# EAGLE board MEMS-preamp_v13a (EAGLE 8.5.0)
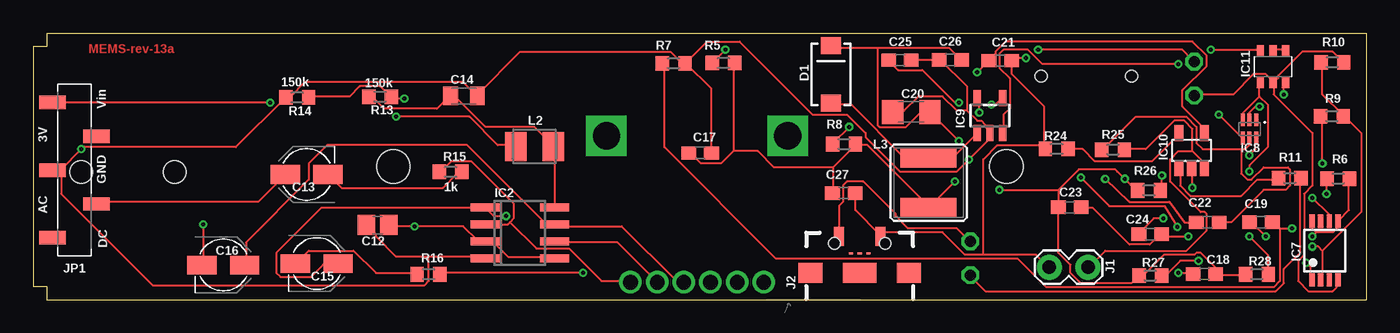
[diagram p0: board, top side]
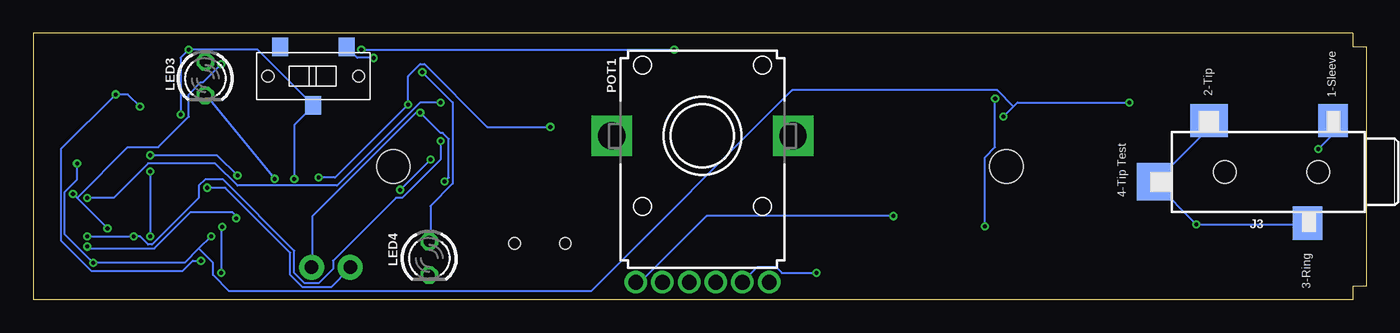
[diagram p1: board, bottom side, seen from below]

Size 100 x 20 mm. Coordinates in mm from the lower left corner, seen from the top.
Outline: 0,19 0,1 1.02,1 1,0 100,0 100,20 1,20 1,19 0,19
Copper layers (1*16): Top 0.035mm / dielectric 1.5mm / Bottom 0.035mm
Design rules "SeeedStudio_2layer_DRU_no_angle_20140221": minimum track width 6mil, minimum drill 12mil, track to track 6mil, track to pad 6mil, pad to pad 6mil, via to via 6mil, smd to smd 0mil, copper to edge 10mil, drill to drill 10mil, minimum pad ring 10mil, minimum via ring 6mil, stop-mask expansion 2mil, vias tented up to drill 100mil, thermal gap 10mil
Holes 2.5 mm at 73,10 27,10

## Footprints (pad centres in the part's own frame; a part is rotated, then mirrored left to right if it is on the bottom)
C0805 = smd 1.3 x 1.5: 1 -0.85,0; 2 0.85,0
PANASONIC_B = smd 2.2 x 1.4: + 1.6,0; - -1.6,0
C0805K = smd 1.1 x 1.4: 1 -1,0; 2 1,0
C0603 = smd 1.1 x 1: 1 -0.85,0; 2 0.85,0
C1206 = smd 1.6 x 1.8: 1 -1.4,0; 2 1.4,0
SMA-DIODE = smd 1.27 x 1.47: A -2.15,0; C 2.15,0
SO08 = smd 0.6 x 2.2: 1 -1.905,-2.6; 2 -0.635,-2.6; 3 0.635,-2.6; 4 1.905,-2.6; 5 1.905,2.6; 6 0.635,2.6; 7 -0.635,2.6; 8 -1.905,2.6
MSOP-8 = smd 0.4 x 1: 1 -0.975,-2.2; 2 -0.325,-2.2; 3 0.325,-2.2; 4 0.975,-2.2; 5 0.975,2.2; 6 0.325,2.2; 7 -0.325,2.2; 8 -0.975,2.2
WSON-6-LONG = smd 0.3 x 0.954: 1 -0.5,-0.686; 2 0,-0.686; 3 0.5,-0.686; 4 0.5,0.686; 5 0,0.686; 6 -0.5,0.686
SOT23-5 = smd 0.55 x 1.2: 1 -0.95,-1.3; 2 0,-1.3; 3 0.95,-1.3; 4 0.95,1.3; 5 -0.95,1.3
SOT-23-5 = smd 0.69 x 1.2: 1 -0.95,-1.3; 2 0,-1.3; 3 0.95,-1.3; 4 0.95,1.3; 5 -0.95,1.3
SOT457R_PHILIPS = smd 0.55 x 0.8: 1 -0.95,-1.2; 2 0,-1.2; 3 0.95,-1.2; 4 0.95,1.2; 5 0,1.2; 6 -0.95,1.2
1X02_LOCK = drill 1.016 pad 1.88: 1 -0.178,0; 2 2.718,0
USB-B-MICRO-SMD_RED_PASTE = smd 0.152 x 0.305: D+ 1.455,0; D- 1.455,0.65; ID 1.455,-0.65 | smd 1.45 x 0.762: GND 2.725,-1.554 | smd 1.5 x 1.8: SHIELD1 0,3.685; SHIELD2 0,-3.685 | smd 1.5 x 2.5: SHIELD3 0,0 | smd 1.45 x 0.781: VBUS 2.725,1.554 | hole 0.85: 2.2,1.9; 2.2,-1.9
TRS_SJ-3524-SMT = smd 2.5 x 2.2: 1 3.85,-4.6; 3 -3.85,-2.7 | smd 2.5 x 2.8: 2 3.85,4.7 | smd 2.8 x 2.5: 4 -0.75,8.85 | hole 1.7: 0,-3.5; 0,3.5
1X05_SMD_STRAIGHT = smd 1 x 2: 1 0,1.65; 2 -2.54,-1.65; 3 -5.08,1.65; 4 -7.62,-1.65; 5 -10.16,1.65
L3225M = smd 1.6 x 2.2: 1 -1.4,0; 2 1.4,0
CR54 = smd 4.2 x 1.4: P$1 0,1.85; P$2 0,-1.85
LED3MM = drill 0.813 octagon: A -1.27,0; K 1.27,0
PTV112 = drill 1.1 pad 1.676: 1.1 -3,-11; 1.2 -5,-11; 1.3 5,-11; 2.1 -1,-11; 2.2 1,-11; 2.3 3,-11 | drill 2.032 pad 2.8 square: M1 -6.8,0; M2 6.8,0
R0603 = smd 1 x 1.1: 1 -0.85,0; 2 0.85,0
SWITCH_SPDT_CL-SB-12B = smd 1.2 x 1.4: P$1 -2.5,-2.2; P$2 0,2.2; P$3 2.5,-2.2 | hole 0.9: -3.4,0; 3.4,0

## Placement (x,y rotation side)
C12  0.1uF  [C0805]  25.83,5.6 180 top
C13  10uF  [PANASONIC_B]  20.5,9.4 180 top
C14  0.1uF  [C0805K]  32.3,15.3 0 top
C15  10uF  [PANASONIC_B]  21.27,2.71 0 top
C16  10uF  [PANASONIC_B]  14.26,2.6 0 top
C17  10uF  [C0603]  50.03,11.01 0 top
C18  56nF  [C0603]  87.86,1.92 0 top
C19  2.2pF  [C0603]  92.11,5.81 0 top
C20  68uF  [C1206]  65.87,14.1 180 top
C21  4.7uF  [C0603]  72.54,17.94 0 top
C22  0.1uF  [C0603]  88.1,5.8 0 top
C23  10uF  [C0603]  77.75,6.93 180 top
C24  10nF  [C0603]  83.79,4.92 180 top
C25  10nF  [C0603]  65.02,17.98 0 top
C26  10uF  [C0603]  68.8,18 180 top
C27  4.7uF  [C0603]  60.8,8 0 top
D1  B130-13-F  [SMA-DIODE]  59.84,16.91 90 top
IC2  OPA2134UA  [SO08]  36.5,5 270 top
IC7  TPS7A49  [MSOP-8]  96.91,3.68 0 top
IC8  BQ297X  [WSON-6-LONG]  91.25,12.81 180 top
IC9  SC4503  [SOT23-5]  71.77,13.82 0 top
IC10  MCP73831  [SOT-23-5]  86.9,11.2 0 top
IC11  QS6K1  [SOT457R_PHILIPS]  93,17.5 0 top
J1  Battery  [1X02_LOCK]  78.95,2.44 180 top
J2  [USB-B-MICRO-SMD_RED_PASTE]  62,2.02 90 top
J3  [TRS_SJ-3524-SMT]  7.1,9.6 90 bottom
JP1  ICS40300  [1X05_SMD_STRAIGHT]  3.09,14.8 90 top
L2  100uH/500mA  [L3225M]  37.6,11.5 0 top
L3  2.7uH  [CR54]  67.17,8.79 180 top
LED3  Power  [LED3MM]  87.1,16.6 270 bottom
LED4  Charge  [LED3MM]  70.3,3.1 270 bottom
POT1  10K  [PTV112]  49.8,12.3 0 bottom
R5  390  [R0603]  51.78,17.77 0 top
R6  1M  [R0603]  97.91,9.09 0 top
R7  100k  [R0603]  48.05,17.74 180 top
R8  15k  [R0603]  60.83,11.68 0 top
R9  100k  [R0603]  97.44,13.77 0 top
R10  11k  [R0603]  97.47,17.82 0 top
R11  470  [R0603]  94.26,9.12 180 top
R13  150k  [R0603]  26.01,15.24 180 top
R14  150k  [R0603]  19.81,15.19 0 top
R15  1k  [R0603]  31.3,9.59 180 top
R16  1k  [R0603]  29.64,1.89 0 top
R24  4.7K  [R0603]  76.78,11.32 0 top
R25  330  [R0603]  81.01,11.26 180 top
R26  2.2k  [R0603]  83.7,8.2 0 top
R27  10M  [R0603]  83.8,1.8 0 top
R28  10M  [R0603]  91.8,1.9 0 top
SW1  SPDT  [SWITCH_SPDT_CL-SB-12B]  79,16.78 180 bottom

## Library data of the parts
C12 C14 = adafruit
C13 C15 C16 IC7-IC11 J3 R5-R11 R13-R16 R24-R28 = CMU-ArtFab
C17-C27 = rcl; SPICEPREFIX: C
D1 = SparkFun
IC2 = linear
J1 = SparkFun-Connectors; G: -; V: +
J2 = CMU-ArtFab; PROD_ID: CONN-11752
JP1 = CMU-ArtFab; CON1: Vin; CON2: 3V; CON3: GND; CON4: AC; CON5: DC
L2 = rcl; SPICEPREFIX: L
L3 = SparkFun-Passives
LED3 LED4 = led; GND: -; V: +
POT1 = CMU-ArtFab; AVAILABILITY: Unavailable; DESCRIPTION: Alt# Tce-10111410; MF: STMicroelectronics; MP: PTV112; PACKAGE: None; PRICE: None
SW1 = CMU-ArtFab; OFF: OFF; ON: ON; POWER: POWER

## Nets
+5V: C21.1 IC10.4 J2.VBUS LED4.A
+12V: C23.1 C24.1 IC7.1 JP1.1 L2.1 R9.1
BATGND1: C22.1 IC8.4 IC11.6 SW1.P$2
GND: C12.2 C14.2 C17.2 C18.2 C20.2 C23.2 C25.2 C26.2 IC2.4 IC7.4 IC9.2 IC11.2 J3.1 JP1.3 LED3.K R7.1 R10.2 R14.1 R26.1 R27.1 R28.1
N$3: C13.+ JP1.4
N$4: C15.- R16.1
N$5: IC2.2 POT1.1.3 R15.2
N$6: LED3.A R5.1
N$7: C16.- J3.2 J3.3 J3.4
N$8: C12.1 IC2.3 IC2.5 R13.1 R14.2
N$9: C15.+ IC2.1 POT1.1.2
N$10: C16.+ IC2.7 POT1.2.2
N$11: D1.A IC9.1 L3.P$2
N$12: C18.1 IC9.4 R8.1
N$13: C19.2 IC9.3 R6.1 R7.2
N$14: C24.2 IC7.2 R9.2 R10.1
N$15: C14.1 IC2.8 L2.2 R13.2
N$16: C25.1 IC7.6
N$17: LED4.K R11.1
N$19: C22.2 IC8.5 R25.2
N$20: IC10.5 R24.2
N$21: IC2.6 POT1.2.3 R16.2
N$23: C13.- R15.1
N$24: IC10.1 R11.2
N$33: IC11.4 IC11.5
N$35: IC8.3 IC11.1 R28.2
N$36: IC8.2 IC11.3 R27.2
N$37: IC8.6 R26.2
USBGND1: C21.2 C27.2 IC10.2 J1.2 J2.GND R24.1 SW1.P$1
V+: C19.1 C20.1 C26.1 D1.C IC7.5 IC7.8 R6.2
VBAT: C17.1 C27.1 IC9.5 IC10.3 J1.1 L3.P$1 R5.2 R8.2 R25.1

## Tracks (layer width: path | path; a pad name or v marks a point on that pad's centre or on a via)
+5V  (via drill 0.3)
  Top 0.152: J2.VBUS 60.45,4.89 60.45,7.03 60.76,7.33 60.76,8.55 61.06,8.86 62.28,8.86 64.72,6.42 64.72,6.27 65.63,5.35 69.29,5.35 70.21,4.44 LED4.A | IC10.4 87.73,12.51 87.73,12.97 86.21,14.5 86.21,15.71 88.04,17.54 88.04,18.3 86.97,19.37 72.95,19.37 72.19,18.61 72.19,18.46 71.73,18 C21.1 71.58,17.85 v70.81,17.09
  Bottom 0.152: v70.81,17.09 68.53,14.8 68.53,8.7 70.21,7.03 70.21,4.44 LED4.A
+12V  (via drill 0.3)
  Top 0.152: v95.5,2.76 95.81,2.46 95.81,1.54 IC7.1 | v86.66,4.74 84.84,4.74 84.68,4.89 C24.1 84.53,4.89 83.77,4.13 82.24,4.13 79.5,6.88 78.74,6.88 C23.1 | v96.72,10.23 96.72,13.73 R9.1 | v17.78,14.8 1.47,14.8 JP1.1 | v27.23,13.73 32.71,13.73 34.85,11.6 36.07,11.6 L2.1
  Bottom 0.152: v86.66,4.74 87.58,3.83 | 87.58,3.83 88.65,2.76 v95.5,2.76 97.64,4.89 97.64,8.09 96.72,9.01 v96.72,10.23 | v17.78,14.8 26.16,14.8 26.47,14.5 | v27.23,13.73 26.47,14.5 | 87.58,3.83 86.51,2.76 86.51,1.85 85.29,0.63 58.17,0.63 43.08,15.71 27.69,15.71 26.47,14.5
BATGND1  (via drill 0.3)
  Top 0.152: v88.34,18.76 92,18.76 IC11.6 | v88.95,13.88 90.63,12.21 IC8.4 | v80.42,9.06 82.24,7.33 85.22,7.33 86.34,5.81 87.12,5.81 C22.1
  Bottom 0.152: v88.95,13.88 88.95,18.15 v88.34,18.76 83.16,18.76 79.04,14.65 SW1.P$2 79.04,14.5 80.42,13.12 v80.42,9.06
GND  (via drill 0.3)
  Top 0.152: 76.91,8.25 76.91,7.03 C23.2 76.91,6.88 76.91,3.52 77.83,2.61 77.83,2 78.59,1.24 82.4,1.24 82.85,1.69 R27.1 83.01,1.85 83.31,1.85 84.84,3.37 87.12,3.37 87.27,3.52 87.58,3.52 88.65,2.46 88.65,2 C18.2 88.8,1.85 90.93,1.85 R28.1 | 76.91,8.25 78.43,9.77 81.18,9.77 81.33,9.62 | 81.33,9.62 82.7,8.25 R26.1 | 93.06,16.32 93.37,16.63 93.37,16.78 95.2,18.61 97.48,18.61 98.25,17.85 R10.2 | IC7.4 97.79,1.39 97.79,0.93 97.48,0.63 95.66,0.63 94.89,1.39 94.89,2.91 95.35,3.37 95.35,7.94 95.96,8.55 95.96,12.51 93.06,15.41 93.06,16.17 IC11.2 93.06,16.32 | 93.06,16.32 92.46,16.93 91.54,16.93 90.02,15.41 87.12,15.41 LED3.K | v81.88,9.07 81.33,9.62 | 29.67,3.22 33.78,3.22 IC2.4 | 29.67,3.22 27.23,3.22 25.7,4.74 25.7,4.89 25.09,5.5 C12.2 | C25.2 65.94,18 C26.2 68.07,18 70.05,16.02 70.05,14.19 | 70.05,14.19 70.81,13.43 71.12,13.43 71.42,13.12 71.42,12.97 71.73,12.67 IC9.2 71.73,12.51 71.73,12.06 v70.21,10.53 69.29,9.62 65.02,9.62 62.43,12.21 62.43,12.51 61.06,13.88 58.47,13.88 52.98,19.37 50.55,19.37 49.02,17.85 R7.1 | 70.05,14.19 69.29,14.19 68.22,15.26 66.4,15.26 65.33,14.19 64.57,14.19 C20.2 | C17.2 50.85,11.14 50.85,15.87 49.02,17.7 R7.1 | 2.08,9.77 1.47,9.77 JP1.3 2.08,9.77 | 2.08,9.77 v3.61,11.29 3.76,11.45 15.19,11.45 18.85,15.1 R14.1 19,15.26 19.3,15.26 20.37,16.32 32.26,16.32 33.17,15.41 C14.2 33.32,15.41 36.52,18.61 47.8,18.61 48.56,17.85 48.87,17.85 R7.1 | 29.67,3.22 29.67,1.39 29.36,1.08 8.94,1.08 2.08,7.94 2.08,9.77 | v72.49,8.25 76.91,8.25
  Bottom 0.152: v81.88,9.07 86.97,15.26 LED3.K | v3.61,11.29 2.54,12.36 2.54,13.43 J3.1 | v70.21,10.53 v72.49,8.25
N$3
  Top 0.152: JP1.4 4.83,7.33 16.87,7.33 18.85,9.31 C13.+
N$4
  Top 0.152: R16.1 28.75,2 25.7,2 24.03,3.67 20.68,3.67 19.76,2.76 C15.-
N$5
  Top 0.152: 35.76,5.81 35.61,5.66 33.93,5.66 IC2.2 | 35.76,5.81 36.07,6.11 36.07,7.18 32.87,10.38 31.34,10.38 30.58,9.62 R15.2 | 35.76,5.81 37.74,3.83 40.18,3.83 42.62,1.39 44.75,1.39 POT1.1.3
N$6  (via drill 0.3)
  Top 0.152: v51.92,18.76 51,17.85 R5.1 | v75.39,18.76 86.21,18.76 86.97,18 LED3.A
  Bottom 0.152: v75.39,18.76 v51.92,18.76
N$7  (via drill 0.3)
  Top 0.152: v12.75,5.66 12.75,2.61 C16.-
  Bottom 0.152: J3.3 4.52,5.66 v12.75,5.66 15.8,8.7 J3.4 15.8,8.86 11.84,12.82 11.84,13.43 J3.2
N$8  (via drill 0.3)
  Top 0.152: R14.2 20.68,15.26 23.72,15.26 24.49,16.02 26.01,16.02 26.77,15.26 R13.1 26.92,15.1 v27.84,15.1 | C12.1 26.77,5.5 v28.6,5.5 32.26,5.5 33.32,4.44 33.78,4.44 IC2.3 33.93,4.28 34.54,4.28 35.61,3.22 38.96,3.22 IC2.5
  Bottom 0.152: v27.84,15.1 27.84,11.45 28.6,10.68 v28.6,5.5
N$9  (via drill 0.3)
  Top 0.152: C15.+ 22.81,2.61 21.74,2.61 20.83,1.69 18.54,1.69 18.24,2 18.24,3.52 21.59,6.88 33.78,6.88 IC2.1 33.93,6.88 34.54,6.27 v35.46,6.27
  Bottom 0.152: v35.46,6.27 49.48,6.27 54.36,1.39 54.66,1.39 POT1.1.2
N$10
  Top 0.152: C16.+ 15.95,2.61 15.95,4.28 20.68,9.01 20.68,10.23 22.05,11.6 32.56,11.6 38.51,5.66 38.96,5.66 IC2.7 39.12,5.5 44.14,5.5 48.26,1.39 48.72,1.39 POT1.2.2
N$11
  Top 0.152: IC9.1 68.99,10.68 67.31,10.68 L3.P$2 67.16,10.68 65.33,10.68 61.37,14.65 59.84,14.65 D1.A
N$12  (via drill 0.3)
  Top 0.152: v85.9,2 86.97,2 C18.1 | v85.83,5.46 84.86,7.03 80.72,7.03 v78.59,9.16 | v71.88,14.65 72.19,14.65 72.64,15.1 IC9.4 | v61.21,12.97 59.99,11.75 R8.1
  Bottom 0.152: v85.9,2 85.9,5.49 v85.83,5.46 | v78.59,9.16 77.37,9.16 v71.88,14.65 71.88,16.78 70.97,17.7 70.66,17.7 65.94,12.97 v61.21,12.97
N$13  (via drill 0.3)
  Top 0.152: 93.52,5.35 93.52,1.39 93.06,0.93 76,0.93 73.86,3.06 55.73,3.06 47.35,11.45 47.35,17.7 R7.2 | 93.52,5.35 93.06,5.81 C19.2 | v97.03,7.94 97.03,9.01 R6.1 | 93.52,5.35 v94.44,5.35 | v85.9,17.7 75.69,17.7 74.62,18.76 72.8,18.76 72.49,18.46 72.49,17.39 73.25,16.63 73.25,14.34 72.8,13.88 72.8,12.67 IC9.3
  Bottom 0.152: v94.44,5.35 96.72,7.64 | 96.72,7.64 v97.03,7.94 | v85.9,17.7 87.27,16.32 87.43,16.32 88.34,15.41 88.34,13.73 90.63,11.45 92.91,11.45 96.72,7.64
N$14  (via drill 0.3)
  Top 0.152: 96.72,3.67 96.72,1.54 IC7.2 | 96.72,3.67 99.62,6.57 99.62,12.51 98.4,13.73 R9.2 98.25,13.88 96.72,15.41 96.72,17.7 R10.1 | v95.96,3.98 96.42,3.98 96.72,3.67 | C24.2 83.01,5.05 84.07,6.11 v84.77,6.11
  Bottom 0.152: v84.77,6.11 84.77,6.26 85.08,6.57 88.19,6.57 90.93,3.83 95.81,3.83 v95.96,3.98
N$15
  Top 0.152: R13.2 25.25,15.1 25.55,15.1 26.31,14.34 30.28,14.34 31.19,15.26 C14.1 31.34,15.26 31.65,15.26 33.93,12.97 37.59,12.97 38.96,11.6 L2.2 39.12,11.45 39.12,7.03 IC2.8
N$16  (via drill 0.3)
  Top 0.152: v95.96,7.64 97.18,6.42 97.18,5.96 IC7.6 | v69.44,14.8 69.14,14.8 66.7,17.24 64.87,17.24 64.26,17.85 C25.1
  Bottom 0.152: v95.96,7.64 93.98,7.64 91.39,10.23 86.36,10.23 84.68,8.55 77.22,8.55 70.97,14.8 v69.44,14.8
N$17
  Top 0.152: R11.1 95.05,9.01 95.05,3.52 93.83,2.3 93.83,1.24 93.22,0.63 71.42,0.63 70.36,1.69 LED4.K
N$19
  Top 0.152: 90.63,11.29 87.73,11.29 87.27,11.75 87.27,12.97 86.51,13.73 82.7,13.73 80.26,11.29 R25.2 | 90.63,11.29 90.93,11.29 91.24,11.6 91.24,12.06 IC8.5 | 90.63,11.29 90.63,9.47 91.08,9.01 91.39,9.01 92.3,9.92 94.13,9.92 94.28,9.77 94.28,8.55 93.98,8.25 92.3,8.25 89.86,5.81 C22.2
N$20
  Top 0.152: R24.2 77.67,11.29 78.74,11.29 79.65,10.38 83.92,10.38 85.9,12.36 IC10.5
N$21  (via drill 0.3)
  Top 0.152: v41.25,2 30.58,2 R16.2 | IC2.6 39.12,4.28 43.84,4.28 46.74,1.39 POT1.2.3
  Bottom 0.152: v41.25,2 43.84,2 44.3,2.46 45.67,2.46 46.74,1.39 POT1.2.3
N$23
  Top 0.152: R15.1 32.11,9.47 31.8,9.47 30.73,8.4 23.11,8.4 22.2,9.31 C13.-
N$24
  Top 0.152: R11.2 93.37,9.01 91.85,9.01 90.63,7.79 86.82,7.79 86.05,8.55 86.05,9.77 IC10.1
N$33
  Top 0.152: IC11.5 93.06,18.76 93.83,18.76 IC11.4
N$35  (via drill 0.3)
  Top 0.152: 92,15.26 92,16.17 IC11.1 | 92,15.26 90.78,14.04 90.78,13.58 IC8.3 | v91.24,4.74 92.61,3.37 92.61,2 R28.2 | v91.24,9.62 91.24,10.07 92.61,11.45 92.61,14.65 92,15.26
  Bottom 0.152: v91.24,9.62 v91.24,4.74
N$36  (via drill 0.3)
  Top 0.152: v93.83,15.41 93.83,16.17 IC11.3 | v92,14.5 91.69,14.5 91.24,14.04 91.24,13.58 IC8.2 | v87.43,2.91 86.05,2.91 84.99,1.85 84.68,1.85 R27.2
  Bottom 0.152: v92,14.5 92.91,15.41 v93.83,15.41 97.94,11.29 97.94,4.44 95.66,2.15 88.8,2.15 88.04,2.91 v87.43,2.91
N$37  (via drill 0.3)
  Top 0.152: v91.24,10.84 91.69,11.29 91.69,12.06 IC8.6 | v84.68,9.31 84.68,8.25 R26.2
  Bottom 0.152: v91.24,10.84 86.21,10.84 v84.68,9.31
USBGND1  (via drill 0.3)
  Top 0.152: 75.84,11.6 75.84,11.45 R24.1 75.84,11.6 | 75.84,11.6 75.84,14.5 73.41,16.93 73.41,17.85 C21.2 73.41,18 73.56,18.15 v74.47,18.15 | 63.5,4.89 61.67,6.72 61.67,7.94 C27.2 | v86.97,8.4 86.97,9.77 IC10.2 | 63.5,4.89 63.65,5.05 68.22,5.05 69.9,3.37 71.27,3.37 | 71.27,3.37 75.23,3.37 76.15,2.46 J1.2 | 63.5,4.89 J2.GND | 75.84,11.6 72.34,11.6 71.27,10.53 71.27,3.37
  Bottom 0.152: v74.47,18.15 75.69,18.15 76.45,18.91 SW1.P$1 | v86.97,8.4 85.6,8.4 80.72,3.52 80.72,1.85 79.81,0.93 77.67,0.93 76.3,2.3 J1.2
V+  (via drill 0.3)
  Top 0.152: 96.27,5.05 95.96,5.35 95.96,5.81 IC7.8 | 96.27,5.05 97.48,5.05 97.79,5.35 97.79,5.81 IC7.5 97.94,5.96 98.7,6.72 98.7,9.01 R6.2 | v92.46,4.74 91.39,5.81 C19.1 | 96.27,5.05 v95.96,4.74 | 63.35,18.91 59.84,18.91 D1.C | 63.35,18.91 68.68,18.91 69.59,18 C26.1 | 63.35,18.91 63.35,13.12 63.5,12.97 65.48,12.97 66.55,14.04 67.16,14.04 C20.1 67.31,14.04 v69.44,11.9
  Bottom 0.152: v95.96,4.74 v92.46,4.74 92,4.74 91.39,4.13 91.08,4.13 87.58,7.64 87.58,8.55 87.12,9.01 85.75,9.01 80.42,3.67 80.42,2 79.65,1.24 78.59,1.24 77.52,2.3 77.52,2.91 72.8,7.64 72.34,7.64 69.44,10.53 v69.44,11.9
VBAT  (via drill 0.3)
  Top 0.152: 86.97,11.14 86.97,12.82 86.36,13.43 85.6,13.43 83.46,11.29 81.94,11.29 R25.1 | 86.97,11.14 87.73,10.38 87.73,9.92 IC10.3 | v70.97,14.04 70.97,15.1 IC9.5 | 86.97,11.14 85.9,11.14 85.29,10.53 85.29,8.86 87.58,6.57 87.88,6.57 88.04,6.42 88.04,5.2 86.51,3.67 80.42,3.67 79.2,2.46 J1.1 | 52.53,11.14 51.61,10.23 50.09,10.23 49.33,10.99 C17.1 | 52.53,11.14 52.53,17.7 R5.2 | 59.99,9.92 59.99,8.09 C27.1 | 59.99,9.92 61.67,11.6 R8.2 61.82,11.6 62.59,11.6 67.16,7.03 L3.P$1 67.31,7.03 v69.14,8.86 | 52.53,11.14 54.36,11.14 55.57,9.92 59.99,9.92
  Bottom 0.152: J1.1 79.04,2.46 79.04,6.27 71.27,14.04 v70.97,14.04 69.44,12.51 69.29,12.51 68.83,12.06 68.83,9.16 v69.14,8.86

## Text on the board
Top: MEMS-rev-13a